# Altium PCB MICROSD_EM_V1.PcbDoc
Units mm, origin at the board's own origin, x right, y up, seen from the top; angles counter-clockwise.
Board outline 76.02 x 28.42 mm, 2 copper layers (Top Layer, Bottom Layer); 5 components, 21 nets, 78 pads, 8 vias.
Unrouted connection lines stored in the file: 3.
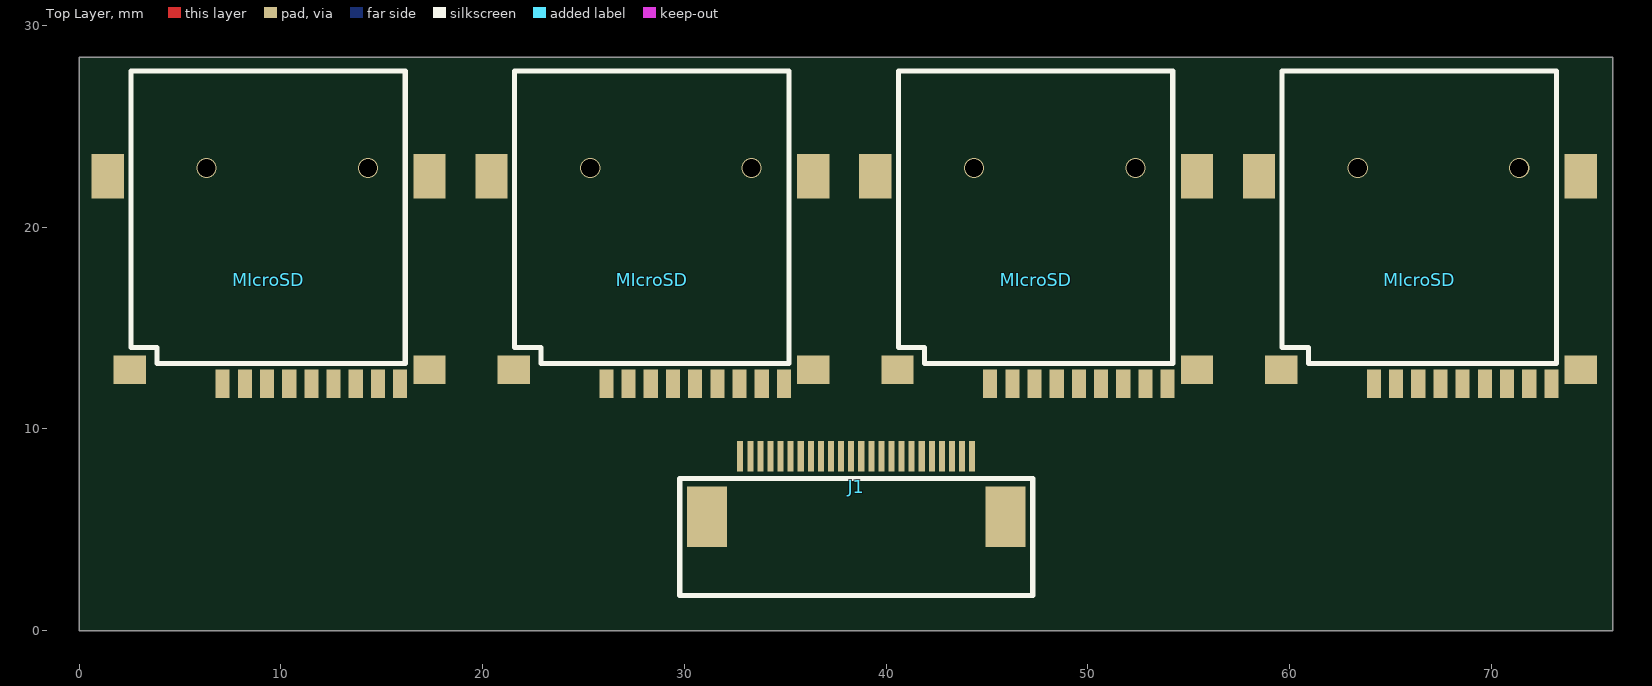
[diagram p0: Top Layer view]
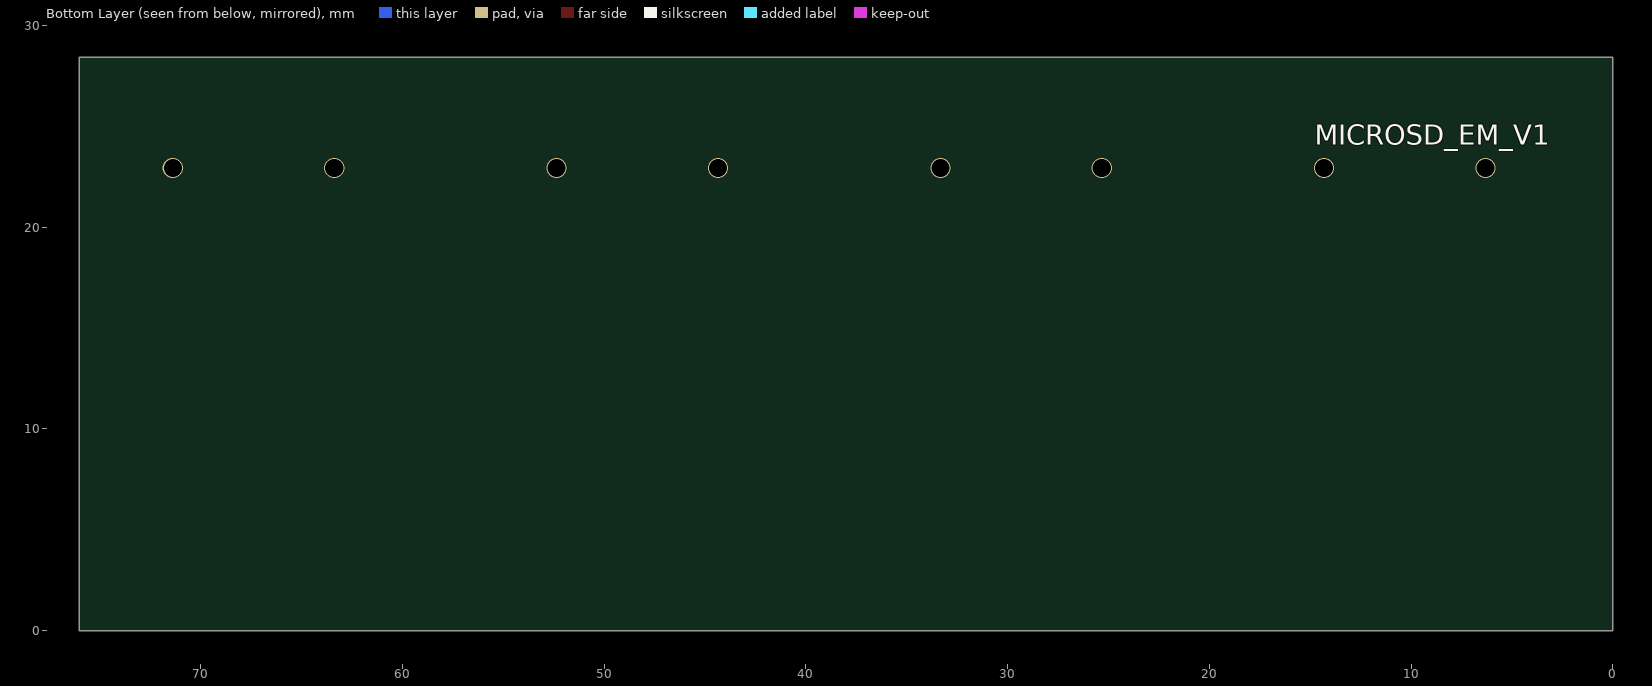
[diagram p1: Bottom Layer view, seen from below]

## Layer stack, top to bottom
Top Solder: solder mask 0.0102, Solder Resist, Dk 3.5
Top Layer: signal copper 0.0356
Dielectric 1: dielectric 0.32, FR-4, Dk 4.8
Bottom Layer: signal copper 0.0356
Bottom Solder: solder mask 0.0102, Solder Resist, Dk 3.5

## Board outline
0,0 0,28.423 76.023,28.423 76.016,0

## Design rules (kind name [scope] priority, off if disabled: settings)
AssemblyTestPointUsage SilkToBoardRegionClearance_1 [All] p2:
AssemblyTestPointUsage SilkToBoardRegionClearance [All] p3:
Clearance [All] p1: gap=0.152 ignorepadtopadclearanceinfootprint=FALSE except(0: Arc-Hole Track-Hole SMDPad-Hole THPad-Hole Via-Hole Fill-Hole Poly-Hole Region-Hole Text-Hole)
HoleSize [All] p1: absolutevalues=TRUE maxlimit=6.35 minlimit=0.3 maxpercent=80.000 minpercent=20.000
MatchedLengths DiffPair_DIFF100MatchedLengths [InDifferentialPairClass('DIFF100')] p1: tolerance=0.152 checknetsindiffpair=TRUE checkdiffpairvsdiffpair=FALSE checkxsignals=FALSE checkothers=FALSE usedelayunits=FALSE
MinimumSolderMaskSliver [All] p1: minsoldermaskwidth=0.1
MinimumSolderMaskSliver SilkscreenOverComponentPads_2 [All] p2: minsoldermaskwidth=0.254
MinimumSolderMaskSliver SilkToSolderMaskClearance_1 [IsPad] p3: minsoldermaskwidth=0.254
MinimumSolderMaskSliver SilkscreenOverComponentPads_1 [All] p4: minsoldermaskwidth=0.254
MinimumSolderMaskSliver SilkToSolderMaskClearance [IsPad] p5: minsoldermaskwidth=0.254
MinimumSolderMaskSliver SilkscreenOverComponentPads [All] p6: minsoldermaskwidth=0.254
PolygonConnect [All] p1: connectstyle=Direct reliefconductorwidth=0.254 reliefentries=4 polygonreliefangle="90 Angle" airgapwidth=0.254
RoomDefinition MICROSD_EM_V1 [InComponentClass('MICROSD_EM_V1')] p1: confinementstyle=ConfineIn formatcopy=TRUE lockcomponents=FALSE outline -0.102,-0.559 75.959,-0.559 75.959,28.613 -0.102,28.613
RoutingVias [All] p1: holewidth=0.305 width=0.635 viastyle="Through Hole" minholewidth=0.305 minwidth=0.635 maxholewidth=0.711 maxwidth=1.27
SilkToBoardRegionClearance SilkToBoardRegionClearance_2 [All] p1:
SilkToSolderMaskClearance SilkToSolderMaskClearance_2 [IsPad] p1: minsilkscreentomaskgap=0.254 clearancetoexposedcopper=TRUE
SolderMaskExpansion [All] p1: expansion=0.102
Width [All] p1: maxlimit=2.54 minlimit=0.152 preferedwidth=0.254
26 further rules are at their usual default settings.

## Classes and differential pairs
component class MICROSD_EM_V1: J1 MIcroSD

## Components (designator, comment, footprint, x,y, rotation, side; value= is the part's Value field where it differs from the comment)
J1 "FCC 24pin 0.5mm pitch" FCC_24P_0.5MM 32.767,8.636 r0 top
MIcroSD "J?" MicroSD_Ali 28.384,11.532 r180 top
MIcroSD "J?" MicroSD_Ali 9.36,11.532 r180 top
MIcroSD "J?" MicroSD_Ali 66.434,11.532 r180 top
MIcroSD "J?" MicroSD_Ali 47.409,11.532 r180 top

## Footprints (in the part's own frame and the unit in brackets; to place one, negate y for a bottom-side part, rotate by r counter-clockwise, add the part's x,y. Pads: shape width x height; smd on the part's side, far side on the other; paste and mask are expansions set on the pad)
FCC_24P_0.5MM [mm]
  rect 0.3x1.5 smd: 1(0,0) 2(0.5,0) 3(1,0) 4(1.5,0) 5(2,0) 6(2.5,0) 7(3,0) 8(3.5,0) 9(4,0) 10(4.5,0) 11(5,0) 12(5.5,0) 13(6,0) 14(6.5,0) 15(7,0) 16(7.5,0) 17(8,0) 18(8.5,0) 19(9,0) 20(9.5,0) 21(10,0) 22(10.5,0) 23(11,0) 24(11.5,0)
  rect 2x3 smd: A(-1.65,-3) A(13.15,-3)
  silkscreen extent -3,-6.9 14.5,-1.1
MicroSD_Ali [mm]
  rect 0.7x1.4 smd: 1(2.25,-0.7) 2(1.15,-0.7) 3(0.05,-0.7) 4(-1.05,-0.7) 5(-2.15,-0.7) 6(-3.25,-0.7) 7(-4.35,-0.7) 8(-5.45,-0.7) 9(-6.55,-0.7)
  rect 1.6x1.4 smd: A(-8,-1.4) A(6.85,-1.4)
  rect 1.6x2.2 smd: A(-8,-11) A(7.95,-11)
  silkscreen extent -6.8,-16.2 6.8,-1.7

## Part data
J1: library part FCC_24P_0.5MM

## Via types
v1: diameter 1, hole 0.9, Top Layer to Bottom Layer, 8 vias

## Nets (pads, with @x,y where several pads share a name; then routed paths per layer and width w, separated by ;. In a path a pad name is that pad's centre, name@x,y a point inside that pad or via, vN(x,y) a via of type N, cw(c..) or ccw(c..) an arc to the next point about the centre after c; other vN are vias at no path point)
B1: J1.3
B2: J1.2
B3: J1.6
B4: J1.4
B5: J1.5
GND: J1.1 J1.12 J1.18 J1.24
M2_D1: J1.23
M2_D2: J1.22
M2_D3: J1.21
M2_D4: J1.20
M2_D5: J1.19
M2_D6: J1.13
M2_D7: J1.14
M2_D8: J1.15
M2_D9: J1.16
M2_D10: J1.17
M3_D1: J1.9
M3_D2: J1.8
M3_D7: J1.7
VCC2: J1.11
VCC3: J1.10
pads on no net: J1.A MIcroSD.1 MIcroSD.2 MIcroSD.3 MIcroSD.4 MIcroSD.5 MIcroSD.6 MIcroSD.7 MIcroSD.8 MIcroSD.9 MIcroSD.A
copper on no net:
  other v1: 6.31,22.932 14.31,22.932 25.335,22.932 33.335,22.932 44.359,22.932 52.359,22.932 63.384,22.932 71.384,22.932

## Polygon pours and split planes (outlines as drawn)
no net on Bottom Layer "NONET_L02_P000" (solid, pour order 0): 0.254,18.161
no net on Top Layer "NONET_L01_P006" (solid, pour order 6): -0.102,-0.559

## Silkscreen, mask and mechanical layers (free items; w line width, h text height)
Bottom Overlay:
  text "MICROSD_EM_V1" at 14.783,24.092 h1
Mechanical 1:
  pour cut-out: 5.961,11.462
  lines w0.2: 0,0 0,28.423 76.023,28.423 76.016,0 0,0